# Altium PCB etapa_1.PcbDoc (part 2 of 2)
Units mil, origin at the board's own origin, x right, y up, seen from the top; angles counter-clockwise.
Board outline 2040 x 2040 mil, 4 copper layers (Top Layer, Conexiones, Tierra, Bottom Layer); 184 components, 104 nets, 594 pads, 243 vias.
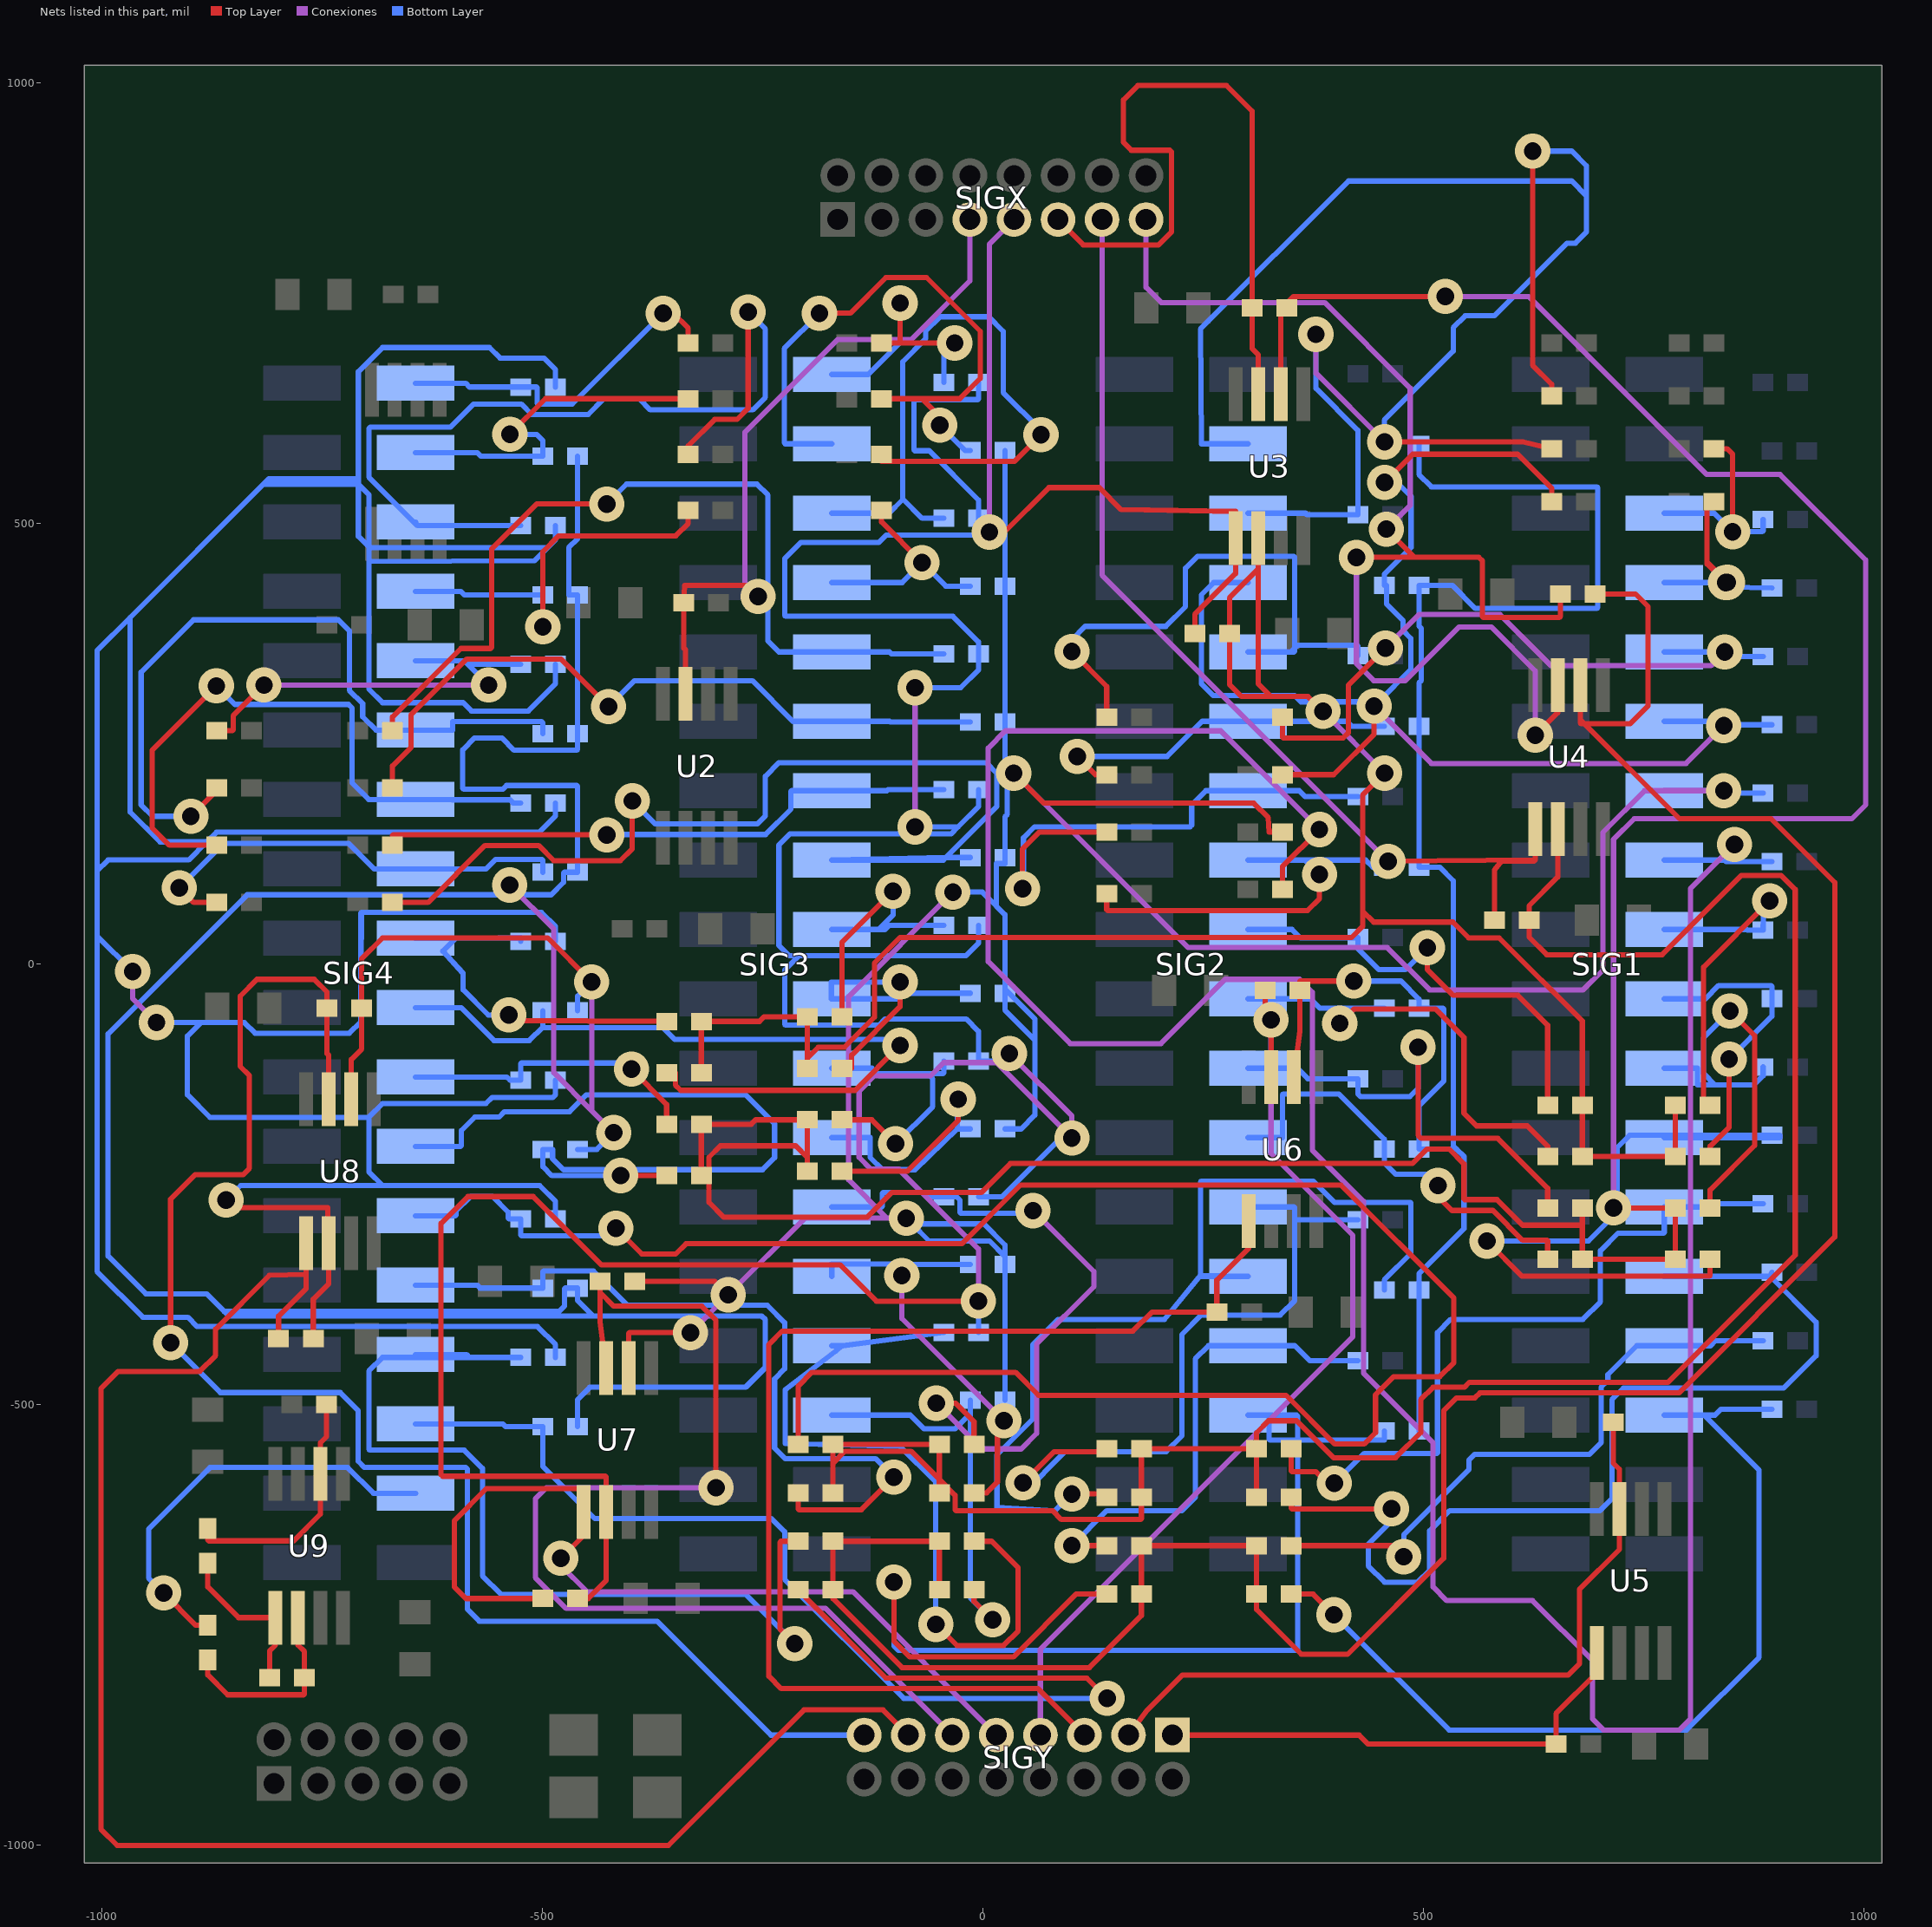
[diagram p4: the nets of this part, all layers, seen from the top]

## Via types
v1: diameter 40, hole 20, Top Layer to Bottom Layer, 192 vias
v2: diameter 40, hole 20, Top Layer to Conexiones, 51 vias

## Nets (pads, with @x,y where several pads share a name; then routed paths per layer and width w, separated by ;. In a path a pad name is that pad's centre, name@x,y a point inside that pad or via, vN(x,y) a via of type N, cw(c..) or ccw(c..) an arc to the next point about the centre after c; other vN are vias at no path point) (continued)
NetR4_2: R4.2 SIGX.7 U2.7 | length 801.1
  Top Layer w6: U2.7@-337.8,306.69 -337.8,356.75 -339.69,358.64 R4.2@-339.69,410 -338.69,429.75 -267.75,429.75 v2(-255.25,417.25)
  Conexiones w6: v2(-255.25,417.25) -270.25,432.25 -270.25,603.75 -165.25,708.75 -81.75,708.75 -15,775.5 SIGX.7@-15,845
NetR4x_2: R4x.2 R4y.2 SIG2.3 | length 1488.3
  Top Layer w6: v1(623.75,922.75) 623.75,679.75 645.31,658.18 R4x.2@645.31,645
  Bottom Layer w6: SIG2.3@300.72,590.55 247.75,590.55 246.75,720.75 414.75,888.75 668.25,888.75 684.75,872.25 ; R4y.2@455.31,590 455.31,617.54 533.66,695.89 533.66,722.21 547.25,735.79 580.36,735.79 662.81,818.25 672.25,818.25 684.75,830.75 684.75,872.25 ; v1(623.75,922.75) 668.25,922.75 684.75,906.25 684.75,872.25
NetR4y_1: R4y.1 R12.1 R12y.1 R20y.1 R28y.1 R36y.1 R44y.1 R52y.1 R60y.1 U6.6 | length 2117.2
  Top Layer w6: U6.6@352.8,-128.31 359.69,-76.36 R12.1@359.69,-30 359.69,-19.75 360.19,-19.25 v1(420.75,-19.25)
  Bottom Layer w6: v1(420.75,-19.25) 474.25,-19.25 494.69,-39.69 R36y.1@494.69,-50 521.75,-50 522.75,-51 522.75,-132.78 494.69,-160.84 R44y.1@494.69,-210 537.5,-210 ; R60y.1@494.69,-530 R52y.1@494.69,-370 494.69,-351.25 545.75,-300.19 545.75,-218.25 537.5,-210 ; R4y.1@494.69,590 494.69,555.75 508.69,541.75 696.75,541.75 697.75,540.75 697.75,404.75 696.75,403.75 558.75,403.75 532.5,430 R12y.1@494.69,430 494.69,383.66 497.5,380.84 497.5,321.97 494.69,319.16 R20y.1@494.69,270 R28y.1@494.69,110 518.25,110 533.75,94.5 533.75,-206.25 537.5,-210
NetR5_1: R5.1 R33x.1 R34x.1 R35x.1 R36x.1 R37x.1 R38x.1 R39x.1 R40x.1 U3.2 | length 2318.2
  Top Layer w6: R40x.1@-319.84,-123.33 R39x.1@-319.84,-65 -253.8,-65 -248.8,-60 R37x.1@-199.68,-60 -199.68,-106.75 ; R38x.1@-199.68,-118.33 -199.68,-106.75 ; U3.2@312.2,483.31 312.2,448.27 ; v2(385.75,286.75) 368.75,303.75 326.7,303.75 ; v2(455.75,216.75) 430.75,191.75 430.75,60.25 ; R33x.1@785.79,-160 R34x.1@785.79,-218.33 R36x.1@680.16,-218.33 R35x.1@680.16,-160 680.16,-64.53 585.87,29.75 551.25,29.75 533.25,47.75 443.25,47.75 430.75,60.25 ; -199.68,-106.75 -187.18,-94.25 -157.25,-94.25 -123.25,-60.25 -123.25,1.25 -94.25,30.25 418.25,30.25 430.75,42.75 430.75,60.25 ; 312.2,448.27 279.69,415.75 R5.1@279.69,375 279.69,317.31 293.25,303.75 326.7,303.75 ; 312.2,448.27 312.2,318.25 326.7,303.75
  Conexiones w6: v2(385.75,286.75) v2(455.75,216.75)
NetR5_2: R5.2 SIGX.9 U3.1 | length 834.9
  Top Layer w6: v2(7.12,490.37) 24.31,490.37 74.75,540.81 131.72,540.81 156.72,515.81 286.61,513.75 U3.1@286.61,483.31 286.61,443.25 240.31,396.95 R5.2@240.31,375
  Conexiones w6: v2(7.12,490.37) 7.12,817.12 SIGX.9@35,845
NetR5x_2: R5x.2 R5y.2 SIG3.1 | length 316.3
  Top Layer w6: R5x.2@-115.31,705 -95.25,705 ; v1(-94.25,750.25) -94.25,706 -95.25,705 ; v1(-32.19,705) -95.25,705
  Bottom Layer w6: SIG3.1@-171.72,669.29 -130.25,669.29 -94.25,705.29 v1(-94.25,750.25) ; R5y.2@-44.69,660 -44.69,692.5 v1(-32.19,705)
NetR5y_1: R5y.1 R13.1 R13y.1 R21y.1 R29y.1 R37y.1 R45y.1 R53y.1 R61y.1 U7.2 | length 4353.8
  Top Layer w6: R13.1@-460.31,-720 -448.25,-720 -427.8,-699.54 U7.2@-427.8,-621.69 -427.8,-582.25 -428.8,-581.25 -613.25,-581.25 -615.25,-579.25 -615.25,-294.25 -584.78,-263.78 -510.72,-263.78 -433.35,-341.16 -162.6,-341.16 -121.25,-382.5 v1(-5.31,-382.5)
  Conexiones w6: v1(-77.25,155.75) v1(-77.25,313.75) ; v1(-5.31,-382.5) -5.31,-323.19 -95.75,-232.75 -127.25,-232.75 -140.75,-219.25 -140.75,-144.25 -123.25,-126.75 -59.75,-126.75 -44.75,-111.75 15.25,-111.75 v1(100.75,-197.25) 100.75,-172.25 v1(29.75,-101.25)
  Bottom Layer w6: v1(-77.25,155.75) -28.31,155.75 ; v1(-77.25,313.75) -25.31,313.75 -5.31,333.75 R21y.1@-5.31,352 -5.31,365.81 -34.25,394.75 -224.25,394.75 -225.25,395.75 -225.25,460.25 -206.75,478.75 -118.25,478.75 -109.93,487.07 -6.93,487.07 -5.31,488.69 R13y.1@-5.31,506 -5.31,526.81 -61.16,582.66 -77.41,582.66 -78.5,583.75 -78.5,639.75 -77.5,640.75 -6.31,640.75 -5.31,641.75 R5y.1@-5.31,660 ; R61y.1@-5.31,-418 v1(-5.31,-382.5) ; R53y.1@-5.31,-264 21.5,-264 88.25,-197.25 v1(100.75,-197.25) ; R37y.1@-5.31,44 -5.31,23.75 -19.31,9.75 -208.75,9.75 ; R29y.1@-5.31,198 -5.31,178.75 -28.31,155.75 ; v1(29.75,-101.25) 21,-110 R45y.1@-5.31,-110 -5.31,-76.19 -19.25,-62.25 -111.25,-62.25 -118.25,-69.25 -224.25,-69.25 -225.25,-68.25 -225.25,-6.75 -208.75,9.75 ; -208.75,9.75 -220.25,9.75 -231.75,21.25 -231.75,135.25 -219.25,147.75 -36.31,147.75 -28.31,155.75
NetR6_1: R6.1 R41x.1 R42x.1 R43x.1 R44x.1 R45x.1 R46x.1 R47x.1 R48x.1 U3.6 | length 3687.4
  Top Layer w6: R48x.1@-319.84,-240 R47x.1@-319.84,-181.67 -263.25,-181.67 -258.25,-176.67 R45x.1@-199.68,-176.67 -199.68,-219.25 ; R46x.1@-199.68,-235 -199.68,-219.25 ; U3.6@337.8,646.69 337.8,743.25 R6.1@342.12,747.57 ; R6.1@344.69,745 R6.1@342.12,747.57 ; v2(524.75,757.75) 352.3,757.75 R6.1@342.12,747.57 ; R43x.1@680.16,-276.67 680.16,-295.25 ; v2(715.53,-276.67) R41x.1@785.79,-276.67 R42x.1@785.79,-335 R44x.1@680.16,-335 680.16,-295.25 ; -199.68,-219.25 -212.68,-206.25 -298.25,-206.25 -311.25,-219.25 -311.25,-270.25 -294.25,-287.25 -131.75,-287.25 -103.75,-259.25 -2.04,-259.25 30.96,-226.25 487.25,-226.25 503.75,-209.75 528.83,-209.75 545.75,-226.67 545.75,-266.25 546.75,-267.25 583.32,-267.25 612.32,-296.25 679.16,-296.25 680.16,-295.25
  Conexiones w6: v2(524.75,757.75) 619.25,757.75 821.25,555.75 904.75,555.75 1001.75,458.75 1001.75,180.75 986.09,165.09 739.09,165.09 715.53,141.53 v2(715.53,-276.67)
NetR6_2: R6.2 SIGX.11 U3.7 | length 833.9
  Top Layer w6: SIGX.11@85,845 113.69,816.31 199.25,816.31 213.69,830.75 213.69,921.75 211.75,923.69 168.25,923.69 159.25,932.69 159.25,980.75 175.72,997.22 276.35,997.22 305.31,968.25 R6.2@305.31,745 305.31,698.64 312.2,691.75 U3.7@312.2,646.69
NetR6x_2: R6x.2 R6y.2 SIG3.3 | length 702.5
  Top Layer w6: v1(-185.72,738.75) -150.67,738.75 -110.17,779.25 -64.19,779.25 -3.19,718.25 -3.19,664.81 -26.33,641.67 -69.25,641.67 ; R6x.2@-115.31,641.67 -69.25,641.67 ; v1(-49.25,611.75) -49.25,621.67 -69.25,641.67
  Bottom Layer w6: v1(-185.72,738.75) -225.72,698.75 -225.72,591.75 -224.52,590.55 SIG3.3@-171.72,590.55 ; v1(-49.25,611.75) -20.5,583 R6y.2@-14.69,583
NetR6y_1: R6y.1 R14.1 R14y.1 R22y.1 R30y.1 R38y.1 R46y.1 R54y.1 R62y.1 U7.6 | length 2430.1
  Top Layer w6: U7.6@-402.2,-458.31 -402.2,-419.25 -401.2,-418.25 v2(-332.25,-418.25) ; R14.1@-395.31,-360 -304.5,-360 v2(-289.25,-375.25)
  Conexiones w6: v2(-332.25,-418.25) v2(-289.25,-375.25) -202.25,-288.25 -109.25,-288.25 ; v1(-87.25,-288.25) -109.25,-288.25 ; v1(-34.25,81.75) -152.75,-36.75 -152.75,-244.75 -109.25,-288.25
  Bottom Layer w6: v1(-87.25,-288.25) v1@-80.66,-294.84 ; v1(-34.25,81.75) -0.84,81.75 15.22,65.68 ; R62y.1@24.69,-495 R54y.1@24.69,-341 R54y.1@24.69,-331.75 ; R46y.1@24.69,-187 43.25,-187 58.75,-171.5 58.75,-86.19 ; R6y.1@24.69,583 R14y.1@24.69,429 R22y.1@24.69,275 24.69,231.66 27.5,228.84 27.5,169.97 24.69,167.16 R30y.1@24.69,121 24.69,114.16 15.22,114.16 15.22,65.68 ; v1@-80.66,-294.84 -61.25,-314.25 7.19,-314.25 R54y.1@24.69,-331.75 ; v1@-80.66,-294.84 0.84,-294.84 24.69,-318.69 R54y.1@24.69,-331.75 ; 15.22,65.68 24.75,56.16 24.75,-28.25 58.75,-62.25 58.75,-86.19 ; 15.22,65.68 15.22,65.62 24.69,56.16 R38y.1@24.69,-33 24.69,-52.13 58.75,-86.19
NetR7_1: R7.1 R49x.1 R50x.1 R51x.1 R52x.1 R53x.1 R54x.1 R55x.1 R56x.1 U4.2 | length 2568.5
  Top Layer w6: R56x.1@-170.32,-600 -170.32,-566.32 ; R54x.1@-49.68,-600 -49.68,-584.82 ; R50x.1@310.32,-605 R49x.1@310.32,-550 ; U4.2@652.2,153.31 652.2,98.69 619.69,66.17 R7.1@619.69,50 619.69,30.75 639.69,10.75 770.75,10.75 860.75,100.75 905.75,100.75 921.75,84.75 921.75,-330.25 777.43,-474.57 551.93,-474.57 546.25,-480.25 510.75,-480.25 496.75,-494.25 496.75,-531.75 468.25,-560.25 397.8,-560.25 355.8,-518.25 323.82,-518.25 310.32,-531.75 R49x.1@310.32,-550 ; -170.32,-566.32 -156.75,-552.75 -81.75,-552.75 -49.68,-584.82 ; -170.32,-566.32 R55x.1@-170.32,-545 R53x.1@-49.68,-545 -49.68,-584.82 ; -49.68,-584.82 -31.75,-602.75 -31.75,-619.25 -30.75,-620.25 78.72,-620.25 88.72,-630.25 178.69,-630.25 179.69,-629.25 R52x.1@179.69,-605 R51x.1@179.69,-550 R49x.1@310.32,-550
NetR7_2: R7.2 SIGX.13 U4.1 | length 1173.2
  Top Layer w6: v2(459.75,116.75) 626.61,118.25 ; R7.2@580.31,50 580.31,106.9 588.26,116.75 625.11,116.75 626.61,118.25 ; U4.1@626.61,153.31 626.61,118.25
  Conexiones w6: SIGX.13@135,845 135,441.5 v2(459.75,116.75)
NetR7x_2: R7x.2 R7y.2 SIG4.1 | length 395.8
  Top Layer w6: v1(-363.25,738.75) -351.68,738.75 -334.69,721.75 R7x.2@-334.69,705
  Bottom Layer w6: SIG4.1@-644.16,659.29 -587.25,659.29 -582.96,655 R7y.2@-524.69,655 -507.25,655 -506.25,654 -506.25,636.75 -505.25,635.75 -466.25,635.75 v1(-363.25,738.75)
NetR7y_1: R7y.1 R15.1 R15y.1 R23y.1 R31y.1 R39y.1 R47y.1 R55y.1 R63y.1 U8.2 | length 6218.5
  Top Layer w6: v1(-859.25,-267.75) -850.75,-276.25 -743.8,-276.25 U8.2@-742.8,-316.69 -742.8,-362.73 -760.31,-380.25 R15.1@-760.31,-425
  Conexiones w6: v1(-965.25,-8.25) -965.25,-39.25 v1(-938.25,-66.25)
  Bottom Layer w6: v1(-965.25,-8.25) -1005.66,32.16 ; v1(-938.25,-66.25) -887.75,-66.25 ; v1(-859.25,-267.75) -842.75,-251.25 -681.75,-251.25 ; R63y.1@-485.31,-446.33 -485.31,-431.69 -505.75,-411.25 -892.25,-411.25 -902.75,-400.75 -953.75,-400.75 -1005.66,-348.84 -1005.66,32.16 ; R55y.1@-485.31,-289 -485.31,-269.25 -503.31,-251.25 -681.75,-251.25 ; R47y.1@-485.31,-131.67 -485.31,-148.31 -488.25,-151.25 -557.25,-151.25 -564.25,-158.25 -681.75,-158.25 -697.25,-173.75 -697.25,-174 ; R39y.1@-485.31,25.67 -485.31,42.81 -501.25,58.75 -705.25,58.75 ; R31y.1@-485.31,183 -485.31,168.25 -503.81,149.75 -870.25,149.75 -881.25,138.75 ; R23y.1@-485.31,340.33 -485.31,318.19 -516.25,287.25 -580.75,287.25 -590.25,296.75 -681.75,296.75 -697.25,312.25 -697.25,456.75 ; R15y.1@-485.31,497.66 -485.31,481.69 -494.25,472.75 ; R7y.1@-485.31,655 -485.31,674.75 -498.31,687.75 -548.25,687.75 -560.25,699.75 -681.75,699.75 -709.16,672.34 -709.16,550.75 ; -1005.66,32.16 -1005.66,105.75 ; -1005.66,105.75 -1005.66,355.94 -968.25,393.35 ; -1005.66,105.75 -993.16,118.25 -901.75,118.25 -881.25,138.75 ; -968.25,393.35 -816.85,544.75 ; -968.25,393.35 -968.25,172.75 -934.25,138.75 -881.25,138.75 ; -887.75,-66.25 -838.37,-66.25 -826.25,-78.37 -719.25,-78.37 -706.25,-65.37 ; -887.75,-66.25 -903.25,-81.75 -903.25,-148.25 -877.5,-174 -697.25,-174 ; -816.85,544.75 -810.85,550.75 -709.16,550.75 ; -816.85,544.75 -709.25,544.75 -709.16,544.66 ; -709.16,544.66 -697.25,532.75 -697.25,473.75 ; -709.16,544.66 -709.16,485.66 -697.25,473.75 ; -709.16,544.66 -709.16,550.75 ; -706.25,-65.37 -706.25,57.75 -705.25,58.75 ; -706.25,-65.37 -705.25,58.75 ; -697.25,-174 -697.25,-235.75 -681.75,-251.25 ; -697.25,456.75 -697.25,473.75 ; -697.25,456.75 -509.25,457.75 -494.25,472.75 ; -697.25,473.75 -696.25,472.75 -494.25,472.75
NetR8_1: R8.1 R57x.1 R58x.1 R59x.1 R60x.1 R61x.1 R62x.1 R63x.1 R64x.1 U4.6 | length 2977
  Top Layer w6: R62x.1@-49.68,-710 R61x.1@-49.68,-655 R63x.1@-170.32,-655 R64x.1@-170.32,-710 -170.32,-720.19 -92.19,-798.31 120.62,-798.31 179.69,-739.25 R60x.1@179.69,-715 R59x.1@179.69,-660 R57x.1@310.32,-660 R58x.1@310.32,-715 310.32,-732.32 361.25,-783.25 413.75,-783.25 522.75,-674.25 522.75,-506.75 537.25,-492.25 558.25,-492.25 563.93,-486.57 789.93,-486.57 966.75,-309.75 966.75,92.75 894.4,165.09 790.45,165.09 682.8,272.75 ; U4.6@677.8,316.69 677.8,277.75 ; R8.1@694.69,420 740.5,420 754.75,405.75 754.75,293.25 734.25,272.75 682.8,272.75 ; 677.8,277.75 677.8,273.75 678.8,272.75 682.8,272.75 ; 677.8,277.75 682.8,272.75
NetR8_2: R8.2 SIGX.15 U4.7 | length 1481.5
  Top Layer w6: v2(423.75,461.75) 489.75,461.75 ; v2(457.75,493.75) 489.75,461.75 ; v2(626.75,259.75) 652.2,285.2 U4.7@652.2,316.69 ; R8.2@655.31,420 655.31,394.75 653.85,393.28 567.75,393.28 566.75,394.28 566.75,457.75 562.75,461.75 489.75,461.75
  Conexiones w6: SIGX.15@185,845 185,768 202.25,750.75 387.75,750.75 484.75,653.75 484.75,520.75 v2(457.75,493.75) ; v2(423.75,461.75) 423.75,341.25 443.25,321.75 479.25,321.75 540.25,382.75 576.75,382.75 626.75,332.75 v2(626.75,259.75)
NetR8x_2: R8x.2 R8y.2 SIG4.3 | length 423.7
  Top Layer w6: v1(-537.19,601.25) -496.77,641.67 R8x.2@-334.69,641.67
  Bottom Layer w6: SIG4.3@-644.16,580.55 -574.25,580.55 -570.03,576.33 R8y.2@-499.69,576.33 -499.69,594.18 -506.75,601.25 v1(-537.19,601.25)
NetR8y_1: R8y.1 R16.1 R16y.1 R24y.1 R32y.1 R40y.1 R48y.1 R56y.1 R64y.1 U8.6 | length 4256.5
  Top Layer w6: U8.6@-717.2,-153.31 -717.2,-108.25 -705.31,-96.36 R16.1@-705.31,-50 -705.31,6.19 -681.75,29.75 -494.25,29.75 v1(-444.25,-20.25)
  Conexiones w6: v1(-537.25,89.75) -487.25,39.75 -487.25,-123.25 -444.25,-166.25 ; v1(-444.25,-20.25) -444.25,-166.25 ; v1(-419.25,-191.25) -444.25,-166.25
  Bottom Layer w6: v1(-537.25,89.75) v1@-548.25,78.75 ; R64y.1@-460.31,-525 -460.31,-494.25 -446.31,-480.25 -270.25,-480.25 ; R48y.1@-460.31,-210.33 -438.33,-210.33 v1(-419.25,-191.25) ; R40y.1@-460.31,-53 -460.31,-36.31 v1(-444.25,-20.25) ; R8y.1@-460.31,576.33 -460.31,482.69 -470.25,472.75 -470.25,419 R16y.1@-460.31,419 R24y.1@-460.31,261.67 -460.31,243.75 -461.31,242.75 -532.25,242.75 -546.25,256.75 -577.22,256.75 -590.72,243.25 -590.72,199.75 -589.47,198.5 -545.25,198.5 -541,202.75 -461.31,202.75 -460.31,201.75 R32y.1@-460.31,104.33 -475.25,104.33 -476.25,103.33 -476.25,92.75 -490.25,78.75 v1@-548.25,78.75 ; -861.25,-394.25 -856.25,-399.25 -442.81,-399.25 ; -861.25,-394.25 -881.25,-374.25 -950.25,-374.25 -993.25,-331.25 -993.25,-79.25 -835.25,78.75 v1@-548.25,78.75 ; -861.25,-394.25 -481.25,-394.25 -475.25,-388.25 -475.25,-368.67 -474.25,-367.67 R56y.1@-460.31,-367.67 -460.31,-381.75 -442.81,-399.25 ; -442.81,-399.25 -251.75,-399.25 ; -270.25,-480.25 -247.25,-457.25 ; -270.25,-480.25 -269.25,-480.25 -247.25,-458.25 -247.25,-457.25 ; -251.75,-399.25 -251.25,-399.25 -247.25,-403.25 -247.25,-403.75 ; -251.75,-399.25 -247.25,-403.75 ; -247.25,-457.25 -247.25,-403.75
NetR9_2: R9.2 SIGY.1 U5.1 | length 561.9
  Top Layer w6: SIGY.1@215,-875 426.75,-875 436.75,-885 R9.2@650.31,-885 650.31,-850.55 696.61,-804.25 U5.1@696.61,-781.69
NetR9x_2: R9x.2 R9y.2 SIG1.5 | length 245.8
  Top Layer w6: R9x.2@829.69,585 844.45,585 850.75,578.7 v1(850.75,490.75)
  Bottom Layer w6: SIG1.5@773.16,511.81 829.69,511.81 v1(850.75,490.75) 884.31,490.75 885.31,491.75 R9y.2@885.31,504.67
NetR10_2: R10.2 SIGY.3 U5.7 | length 843.5
  Top Layer w6: SIGY.3@165,-875 185.75,-847.31 226.31,-806.75 664.25,-806.75 676.75,-794.25 676.75,-709.71 722.2,-664.25 U5.7@722.2,-618.31 722.2,-573.25 715.31,-566.36 R10.2@715.31,-520
NetR10x_2: R10x.2 R10y.2 SIG1.7 | length 266.5
  Top Layer w6: R10x.2@829.69,525 821.75,525 821.75,456.25 ; v1(842.75,433.07) 821.75,454.07 821.75,456.25 ; v1(844.75,433.25) 821.75,456.25
  Bottom Layer w6: SIG1.7@773.16,433.07 v1(842.75,433.07) ; v1(844.75,433.25) 844.75,428 R10y.2@895.31,427
NetR11_2: R11.2 SIGY.5 U6.1 | length 1404.5
  Top Layer w6: SIGY.5@115,-875 62.31,-822.31 -229.19,-822.31 -243.25,-808.25 -243.25,-431.75 -228.07,-416.57 170,-416.57 191.58,-395 R11.2@265.31,-395 265.31,-358.69 301.61,-322.39 U6.1@301.61,-291.69
NetR11x_2: R11x.2 R11y.2 SIG2.5 | length 694.6
  Top Layer w6: v2(455.75,592.75) 612.75,592.75 R11x.2@645.31,585
  Conexiones w6: v1(377.75,714.75) 377.75,670.75 v2(455.75,592.75)
  Bottom Layer w6: SIG2.5@300.72,511.81 365.93,511.81 367.74,510 R11y.2@425.31,510 425.31,605.75 377.75,653.31 v1(377.75,714.75)
NetR12_2: R12.2 SIGY.7 U6.7 | length 1118.6
  Top Layer w6: R12.2@320.31,-30 320.31,-76.36 327.2,-83.25 ; v2(326.75,-63.25) 327.2,-63.71 327.2,-83.25 ; U6.7@327.2,-128.31 327.2,-83.25
  Conexiones w6: SIGY.7@65,-875 65,-777.57 419.75,-422.82 419.75,-307.85 326.75,-214.85 v2(326.75,-63.25)
NetR12x_2: R12x.2 R12y.2 SIG2.7 | length 914.5
  Top Layer w6: v1(455.75,546.75) 487.75,578.75 606.75,578.75 645.31,540.18 R12x.2@645.31,525
  Bottom Layer w6: SIG2.7@300.72,433.07 261.75,433.07 247.72,419.04 247.72,318.25 261.22,304.75 353.75,304.75 360.75,297.75 448.75,297.75 485.5,334.5 485.5,369.75 476.75,378.5 476.75,389.75 457.75,408.75 457.75,430 R12y.2@455.31,430 455.31,442.49 485.75,472.93 485.75,530.75 469.75,546.75 v1(455.75,546.75)
NetR13_2: R13.2 SIGY.9 U7.1 | length 1015
  Top Layer w6: R13.2@-499.69,-720 -587,-720 -600.25,-706.75 -600.25,-631.75 -563.75,-595.25 -453.39,-595.25 U7.1@-453.39,-621.69 -453.39,-648.39 v2(-479.25,-674.25)
  Conexiones w6: v2(-479.25,-674.25) -479.25,-682.55 -449.55,-712.25 -147.75,-712.25 SIGY.9@15,-875
NetR13x_2: R13x.2 R13y.2 SIG3.5 | length 782.3
  Top Layer w6: R13x.2@-115.31,578.33 -115.31,570.75 35.75,570.75 v1(65.75,600.75)
  Bottom Layer w6: SIG3.5@-171.72,511.81 -106.75,511.81 -91.25,527.31 -91.25,528 ; R13y.2@-44.69,506 -69.25,506 -91.25,528 ; v1(65.75,600.75) 65.75,605.75 22.75,648.75 22.75,718.25 6.25,734.75 -48.75,734.75 -65.25,718.25 -65.25,709.72 -91.25,683.72 -91.25,528
NetR14_2: R14.2 SIGY.11 U7.7 | length 1280.2
  Top Layer w6: R14.2@-434.69,-360 -434.69,-372.82 ; U7.7@-427.8,-458.31 -434.69,-406.36 -434.69,-372.82 ; v2(-303.25,-594.25) -303.25,-404.25 -319.25,-388.25 -419.25,-388.25 -434.69,-372.82
  Conexiones w6: v2(-303.25,-594.25) -495.75,-594.25 -508.25,-606.75 -508.25,-696.25 -473.25,-731.25 -178.75,-731.25 SIGY.11@-35,-875
NetR14x_2: R14x.2 R14y.2 SIG3.7 | length 255.8
  Top Layer w6: R14x.2@-115.31,515 -115.31,501.81 v1(-69.25,455.75)
  Bottom Layer w6: SIG3.7@-171.72,433.07 -91.93,433.07 v1(-69.25,455.75) -42.5,429 R14y.2@-14.69,429
NetR15_2: R15.2 SIGY.13 U8.1 | length 1924.5
  Top Layer w6: R15.2@-799.69,-425 -799.69,-399.55 -768.39,-368.25 -768.39,-352.25 ; U8.1@-768.39,-316.69 -768.39,-352.25 ; SIGY.13@-85,-875 -113.69,-846.31 -203.31,-846.31 -357.25,-1000.25 -982.75,-1000.25 -1001.25,-981.75 -1001.25,-481.75 -981.75,-462.25 -889.25,-462.25 -871.25,-444.25 -871.25,-414.25 -810.25,-353.25 -768.39,-352.25
NetR15x_2: R15x.2 R15y.2 SIG4.5 | length 1049.9
  Top Layer w6: R15x.2@-334.69,578.33 -334.69,588.31 -304.75,618.25 -279.25,618.25 -266.75,630.75 v1(-266.75,740.25)
  Bottom Layer w6: SIG4.5@-644.16,501.81 SIG4.5@-642.08,497.66 ; R15y.2@-524.69,497.66 SIG4.5@-642.08,497.66 ; v1(-266.75,740.25) -247.25,720.75 -247.25,643.25 -261.5,629 -377.72,629 -390.22,641.5 -430.47,641.5 -448.22,623.75 -512.25,623.75 -524.25,635.75 -578.25,635.75 -604.45,609.55 -695.36,609.55 -697.16,607.75 -697.16,552.75 SIG4.5@-642.08,497.66
NetR16_2: R16.2 SIGY.15 U8.7 | length 1800.2
  Top Layer w6: v1(-922.25,-429.75) -922.25,-266.75 -894.25,-238.75 -839.72,-238.75 -832.72,-231.75 -832.72,-126.53 -843.25,-116 -843.25,-36.25 -824.25,-17.25 -759.19,-17.25 -744.69,-31.75 R16.2@-744.69,-50 -744.69,-101.36 -742.8,-103.25 U8.7@-742.8,-153.31
  Bottom Layer w6: v1(-922.25,-429.75) -865.75,-486.25 -729.75,-486.25 -709.25,-506.75 -709.25,-564.25 -702.25,-571.25 -587.25,-571.25 -585.25,-573.25 -585.25,-732.25 -571.79,-745.72 -370,-745.72 -240.72,-875 SIGY.15@-135,-875
NetR16x_2: R16x.2 R16y.2 SIG4.7 | length 461
  Top Layer w6: v1(-499.69,382.75) -499.69,468.25 -481.93,486 -348.75,486 -334.69,500.07 R16x.2@-334.69,515
  Bottom Layer w6: SIG4.7@-644.16,423.07 -592.82,423.07 -588.75,419 R16y.2@-499.69,419 v1(-499.69,382.75)
NetR17_1: R17.1 R18.1 U9.2 | length 226.1
  Top Layer w6: R17.1@-880,-789.68 -880,-806.75 -857.5,-829.25 -771.31,-829.25 -770.31,-828.25 R18.1@-770.31,-810 -770.31,-780.25 -777.8,-772.77 U9.2@-777.8,-741.69
NetR17_2: R17.2 SIG4.33 | length 489.3
  Top Layer w6: v1(-930.25,-713.75) -893.69,-750.31 R17.2@-880,-750.31
  Bottom Layer w6: v1(-930.25,-713.75) -947.25,-696.75 -947.25,-641.09 -877.41,-571.25 -721.25,-571.25 -691.95,-600.55 SIG4.33@-644.16,-600.55
NetR17x_2: R17x.2 R17y.2 SIG1.9 | length 775.1
  Top Layer w6: R17x.2@339.69,280 339.69,257.75 340.69,256.75 408.75,256.75 414.75,262.75 414.75,316.75 v2(456.75,358.75)
  Conexiones w6: v2(456.75,358.75) 494.75,396.75 586.75,396.75 644.75,338.75 826.17,338.75 v1(841.75,354.33)
  Bottom Layer w6: SIG1.9@773.16,354.33 v1@825.75,354.33 ; v1(841.75,354.33) v1@825.75,354.33 ; R17y.2@885.31,349.33 830.75,349.33 v1@825.75,354.33
NetR18_2: R18.2 R19.1 U9.1 | length 189.1
  Top Layer w6: R19.1@-880,-679.68 -880,-706.75 -845.06,-741.69 U9.1@-803.39,-741.69 -803.39,-772.95 -809.69,-779.25 R18.2@-809.69,-810
NetR18x_2: R18x.2 R18y.2 SIG1.11 | length 729.9
  Top Layer w6: R18x.2@339.69,215 397.89,215 443.75,260.86 v2(443.75,292.75)
  Conexiones w6: v2(443.75,292.75) 508.75,227.75 797.75,227.75 v1(840.75,270.75)
  Bottom Layer w6: SIG1.11@773.16,275.59 v1@831.75,275.59 ; v1(840.75,270.75) v1@831.75,275.59 ; R18y.2@895.31,271.67 840.75,271.67 v1@831.75,275.59
NetR19_2: R19.2 R20.1 U9.6 | length 280.9
  Top Layer w6: R19.2@-880,-640.31 -880,-653.25 -878.7,-654.55 -782.55,-654.55 -752.2,-624.2 U9.6@-752.2,-578.31 -752.2,-543.25 -745.31,-536.36 R20.1@-745.31,-500
NetR19x_2: R19x.2 R19y.2 SIG2.9 | length 672.9
  Top Layer w6: v1(100.75,354.75) 140.31,315.18 R19x.2@140.31,280
  Bottom Layer w6: v1(100.75,354.75) 100.75,368.25 115.83,383.33 207.33,383.33 229.75,405.75 229.75,449.25 243.25,462.75 352.75,462.75 353.75,461.75 353.75,358.83 ; SIG2.9@300.72,354.33 349.25,354.33 ; R19y.2@425.31,350 425.31,360.75 424.28,361.78 356.7,361.78 353.75,358.83 ; 349.25,354.33 353.75,358.83 ; 349.25,354.33 352.75,354.33 353.75,355.33 353.75,358.83
NetR20x_2: R20x.2 R20y.2 SIG2.11 | length 409.5
  Top Layer w6: v1(106.75,235.75) 127.5,215 R20x.2@140.31,215
  Bottom Layer w6: v1(106.75,235.75) 208.91,235.75 248.75,275.59 SIG2.11@300.72,275.59 412.75,275.59 418.34,270 R20y.2@455.31,270
NetR21x_2: R21x.2 R21y.2 SIG3.9 | length 992.8
  Top Layer w6: R21x.2@-670.31,265 -670.31,280.71 -592.75,358.28 -559.16,358.28 -557.69,359.75 -557.69,471.31 -506.75,522.25 v1(-427.25,522.25)
  Bottom Layer w6: v1(-427.25,522.25) -404.75,544.75 -256.75,544.75 -244.25,532.25 -244.25,366.83 -231.75,354.33 SIG3.9@-171.72,354.33 -106.25,354.33 -103.92,352 R21y.2@-44.69,352
NetR22x_2: R22x.2 R22y.2 SIG3.11 | length 806.5
  Top Layer w6: R22x.2@-670.31,200 -670.31,224.94 -649.5,245.75 -649.5,282.78 -586,346.28 -479.29,346.28 v1(-425.25,292.25)
  Bottom Layer w6: v1(-425.25,292.25) -395.75,321.75 -262.01,321.75 -215.85,275.59 SIG3.11@-171.72,275.59 -106.25,275.59 -105.66,275 R22y.2@-14.69,275
NetR23x_2: R23x.2 R23y.2 SIG4.9 | length 499.2
  Top Layer w6: R23x.2@-869.69,265 -852.25,265 -851.25,266 -851.25,281.75 v2(-816.25,316.75)
  Conexiones w6: v2(-816.25,316.75) v1(-561.25,316.75)
  Bottom Layer w6: SIG4.9@-644.16,344.33 -588.83,344.33 ; v1(-561.25,316.75) -588.83,344.33 ; R23y.2@-524.69,340.33 -583.26,340.33 -587.25,344.33 -588.83,344.33
NetR24x_2: R24x.2 R24y.2 SIG4.11 | length 861.5
  Top Layer w6: v1(-899.25,167.75) -872.25,194.75 -872.25,200 R24x.2@-869.69,200
  Bottom Layer w6: v1(-899.25,167.75) -942.66,167.75 -955.66,180.75 -955.66,331.34 -896.25,390.75 -731.75,390.75 -719.25,378.25 -719.25,310.72 -704.25,295.72 -704.25,280.75 -689.09,265.59 SIG4.11@-644.16,265.59 -602.25,265.59 -602.25,275.25 -501.19,275.25 -499.69,273.75 R24y.2@-499.69,261.67
NetR25x_2: R25x.2 R25y.2 SIG1.13 | length 1560.6
  Top Layer w6: v2(34.75,216.75) 68.75,182.75 307.25,182.75 323.75,166.25 324.75,150 R25x.2@339.69,150
  Conexiones w6: v2(34.75,216.75) 232.75,18.75 458.75,18.75 506.75,-29.25 681.03,-29.25 703.53,-6.75 703.53,149.53 750.85,196.85 v1(840.75,196.85)
  Bottom Layer w6: SIG1.13@773.16,196.85 v1@827.75,196.85 ; v1(840.75,196.85) v1@827.75,196.85 ; R25y.2@885.31,194 830.6,194 v1@827.75,196.85
NetR26x_2: R26x.2 R26y.2 SIG1.15 | length 3497.1
  Top Layer w6: R26x.2@339.69,85 339.69,110.69 v2(381.75,152.75)
  Conexiones w6: v2(381.75,152.75) 269.75,264.75 25.25,264.75 5.75,245.25 5.75,2.75 98.75,-90.25 201.75,-90.25 274.75,-17.25 359.25,-17.25 373.75,-31.75 373.75,-211.25 431.75,-269.25 431.75,-464.25 510.75,-543.25 510.75,-706.75 526.25,-722.25 623.75,-722.25 691.75,-790.25 691.75,-856.75 704.25,-869.25 790.25,-869.25 802.75,-856.75 802.75,85.75 v1(852.75,135.75)
  Bottom Layer w6: SIG1.15@773.16,118.11 835.11,118.11 ; v1(852.75,135.75) 835.11,118.11 ; R26y.2@895.31,116.33 843.3,116.33 841.53,118.11 835.11,118.11
NetR27x_2: R27x.2 R27y.2 SIG2.13 | length 624.5
  Top Layer w6: v1(44.75,85.75) 44.75,130.75 64,150 R27x.2@140.31,150
  Bottom Layer w6: v1(44.75,85.75) 45.75,86.75 45.75,143.25 58.35,155.85 234.82,155.85 236.72,157.75 236.72,180.75 252.82,196.85 SIG2.13@300.72,196.85 358.75,196.85 365.6,190 R27y.2@425.31,190
NetR28x_2: R28x.2 R28y.2 SIG2.15 | length 474.3
  Top Layer w6: R28x.2@140.31,80 140.31,61.75 141.31,60.75 368.25,60.75 381.75,74.25 v1(381.75,101.75)
  Bottom Layer w6: SIG2.15@300.72,118.11 365.39,118.11 ; v1(381.75,101.75) 365.39,118.11 ; R28y.2@455.31,110 442.25,110 434.14,118.11 365.39,118.11
NetR29x_2: R29x.2 R29y.2 SIG3.13 | length 669.8
  Top Layer w6: R29x.2@-670.31,135 -670.31,145.75 -669.31,146.75 v1(-427.25,146.75)
  Bottom Layer w6: v1(-427.25,146.75) -426.89,147.11 -246.89,147.11 -218.25,175.75 -218.25,195.85 -217.25,196.85 SIG3.13@-171.72,196.85 -109.25,196.85 -108.1,198 R29y.2@-44.69,198
NetR30x_2: R30x.2 R30y.2 SIG3.15 | length 1258.3
  Top Layer w6: R30x.2@-670.31,70 -630,70 -565.25,134.75 -504.59,134.75 -487.18,117.33 -411.67,117.33 -398.25,130.75 v1(-398.25,185.25)
  Bottom Layer w6: v1(-398.25,185.25) -372.11,159.11 -256.39,159.11 -247.25,168.25 -247.25,213.25 -231.75,228.75 3.5,228.75 15.5,216.75 15.5,178.75 -42.25,121 ; R30y.2@-14.69,121 -42.25,121 ; -42.25,121 SIG3.15@-171.72,118.11 -45.14,118.11 -42.25,121
NetR31x_2: R31x.2 R31y.2 SIG4.13 | length 723.5
  Top Layer w6: v1(-870.25,315.75) -943.25,242.75 -943.25,154.75 -923.5,135 R31x.2@-869.69,135
  Bottom Layer w6: v1(-870.25,315.75) -849.25,294.75 -720.25,294.75 -716.25,290.75 -716.25,205.75 -697.35,186.85 SIG4.13@-644.16,186.85 -602.72,186.85 -602.72,186.5 -537,186.5 -533.5,183 R31y.2@-524.69,183
NetR32x_2: R32x.2 R32y.2 SIG4.15 | length 513.7
  Top Layer w6: v1(-912.5,86.5) -896.01,70 R32x.2@-869.69,70
  Bottom Layer w6: v1(-912.5,86.5) -861.89,137.11 -720.25,137.11 -691.25,108.11 SIG4.15@-644.16,108.11 -564.15,108.11 -553.52,118.75 -500.69,118.75 -499.69,117.75 R32y.2@-499.69,104.33
NetR33x_2: R33x.2 R33y.2 SIG1.17 | length 418.5
  Top Layer w6: R33x.2@825.16,-160 817.75,-160 817.75,-3.25 v1(892.75,71.75)
  Bottom Layer w6: SIG1.17@773.16,39.37 866.69,39.37 867.4,38.67 R33y.2@885.31,38.67 886.11,65.11 v1(892.75,71.75)
NetR34x_2: R34x.2 R34y.2 SIG1.19 | length 351
  Top Layer w6: R34x.2@825.16,-218.33 825.16,-206.75 846.75,-185.16 v1(846.75,-107.75)
  Bottom Layer w6: SIG1.19@773.16,-39.37 819.75,-39.37 834.88,-24.24 894.3,-24.24 895.31,-25.25 R34y.2@895.31,-39 895.31,-59.19 v1(846.75,-107.75)
NetR35x_2: R35x.2 R35y.2 SIG2.17 | length 518.3
  Top Layer w6: v1(504.25,18.75) 504.25,-6.25 533.37,-35.37 606.9,-35.37 640.79,-69.25 R35x.2@640.79,-160
  Bottom Layer w6: SIG2.17@300.72,39.37 350.52,39.37 359.89,30 R35y.2@425.31,30 425.31,17.75 449.31,-6.25 479.25,-6.25 v1(504.25,18.75)
NetR36x_2: R36x.2 R36y.2 SIG2.19 | length 552.6
  Top Layer w6: v1(404.75,-67.25) 420.92,-51.08 513.61,-51.08 545.75,-83.22 545.75,-169.25 560.09,-183.59 617.62,-183.59 640.79,-206.75 R36x.2@640.79,-218.33
  Bottom Layer w6: SIG2.19@300.72,-39.37 371.75,-39.37 382.38,-50 422,-50 ; v1(404.75,-67.25) 422,-50 ; R36y.2@455.31,-50 422,-50
NetR37x_2: R37x.2 R37y.2 SIG3.17 | length 345.9
  Top Layer w6: R37x.2@-160.31,-60 -160.31,24.69 v1(-102.25,82.75)
  Bottom Layer w6: SIG3.17@-171.72,39.37 -118.63,39.37 ; v1(-102.25,82.75) -102.25,55.75 -118.63,39.37 ; R37y.2@-44.69,44 -106.62,44 -111.25,39.37 -118.63,39.37
NetR38x_2: R38x.2 R38y.2 SIG3.19 | length 389.2
  Top Layer w6: R38x.2@-160.31,-118.33 -149.28,-118.33 -149.28,-103.25 -94.25,-48.22 v1(-94.25,-20.25)
  Bottom Layer w6: v1(-94.25,-20.25) -172.25,-20.25 -172.25,-39.37 SIG3.19@-171.72,-39.37 -97.25,-39.37 -90.88,-33 R38y.2@-14.69,-33
NetR39x_2: R39x.2 R39y.2 SIG4.17 | length 446.3
  Top Layer w6: v1(-538.25,-57.75) -538.25,-64 R39x.2@-359.21,-65
  Bottom Layer w6: SIG4.17@-644.16,29.37 -598.63,29.37 ; v1(-538.25,-57.75) -561.75,-57.75 -590.25,-29.25 -590.25,-10.25 -613.25,14.75 -598.63,29.37 ; R39y.2@-524.69,25.67 -524.69,29.75 -549.87,29.75 -598.63,29.37
NetR40x_2: R40x.2 R40y.2 SIG4.19 | length 901.3
  Top Layer w6: R40x.2@-359.21,-123.33 -349.25,-123.33 -349.25,-137.25 -343.25,-143.25 -145.25,-143.25 v1(-94.25,-92.25)
  Bottom Layer w6: SIG4.19@-644.16,-49.37 -592.47,-49.37 -555.09,-86.75 -515.19,-86.75 -499.69,-71.25 ; R40y.2@-499.69,-53 -499.69,-71.25 ; v1(-94.25,-92.25) -101.25,-85.25 -350.25,-85.25 -363.25,-72.25 -498.69,-72.25 -499.69,-71.25
NetR41x_2: R41x.2 R41y.2 SIG1.21 | length 503.5
  Top Layer w6: R41x.2@825.16,-276.67 825.16,-256.34 875.75,-205.75 875.75,-81.25 v1(847.75,-53.25)
  Bottom Layer w6: SIG1.21@773.16,-118.11 810.75,-118.11 810.75,-137.25 830.75,-137.25 ; v1(847.75,-53.25) 817.75,-83.25 817.75,-124.25 830.75,-137.25 ; R41y.2@885.31,-116.67 885.31,-126.69 874.75,-137.25 830.75,-137.25
NetR42x_2: R42x.2 R42y.2 SIG1.23 | length 847.2
  Top Layer w6: v1(571.75,-314.25) 611.75,-354.25 824.16,-354.25 825.16,-353.25 R42x.2@825.16,-335
  Bottom Layer w6: v1(571.75,-314.25) 687.19,-314.25 719.75,-281.69 719.75,-208.25 733.67,-194.33 R42y.2@895.31,-194.33 904.13,-194.33 904.13,-196.85 SIG1.23@773.16,-196.85
NetR43x_2: R43x.2 R43y.2 SIG2.21 | length 561.4
  Top Layer w6: v1(493.75,-94.25) 493.75,-194.25 497.25,-197.75 584.29,-197.75 640.79,-254.25 R43x.2@640.79,-276.67
  Bottom Layer w6: SIG2.21@300.72,-118.11 356.75,-118.11 368.64,-130 R43y.2@425.31,-130 425.31,-147.32 428.25,-150.25 484.5,-150.25 493.75,-141 v1(493.75,-94.25)
NetR44x_2: R44x.2 R44y.2 SIG2.23 | length 501.8
  Top Layer w6: v1(516.25,-251.25) 516.25,-263.75 532.09,-279.59 578.69,-279.59 612.42,-313.33 639.75,-313.33 640.79,-314.37 R44x.2@640.79,-335
  Bottom Layer w6: SIG2.23@300.72,-196.85 339.75,-196.85 339.75,-148.25 340.75,-147.25 403.75,-147.25 455.31,-198.82 R44y.2@455.31,-210 455.31,-225.38 468.25,-238.32 503.31,-238.32 v1(516.25,-251.25)
NetR45x_2: R45x.2 R45y.2 SIG3.21 | length 372
  Top Layer w6: R45x.2@-160.31,-176.67 -126.34,-176.67 v1(-99.25,-203.75)
  Bottom Layer w6: SIG3.21@-171.72,-118.11 -126.39,-118.11 -120.25,-124.25 ; v1(-99.25,-203.75) -57.25,-161.75 -57.25,-130.11 -60.61,-126.75 -117.75,-126.75 -120.25,-124.25 ; R45y.2@-44.69,-110 -44.69,-123.25 -45.69,-124.25 -120.25,-124.25
NetR46x_2: R46x.2 R46y.2 SIG3.23 | length 418.6
  Top Layer w6: R46x.2@-160.31,-235 -86,-235 -28.25,-177.25 v1(-28.25,-153.25)
  Bottom Layer w6: SIG3.23@-171.72,-196.85 -128.25,-196.85 -128.25,-219.25 -114.25,-233.25 -77.25,-233.25 -29.25,-187 ; v1(-28.25,-153.25) -29.25,-153.25 -29.25,-187 ; R46y.2@-14.69,-187 -29.25,-187
NetR47x_2: R47x.2 R47y.2 SIG4.21 | length 347.1
  Top Layer w6: v1(-399.21,-119.25) -359.21,-159.25 R47x.2@-359.21,-181.67
  Bottom Layer w6: SIG4.21@-644.16,-128.11 -540.64,-128.11 -537.08,-131.67 R47y.2@-524.69,-131.67 -524.69,-113.25 -523.69,-112.25 -406.21,-112.25 v1(-399.21,-119.25)
NetR48x_2: R48x.2 R48y.2 SIG4.23 | length 942.2
  Top Layer w6: v1(-411.5,-240) R48x.2@-359.21,-240
  Bottom Layer w6: SIG4.23@-644.16,-206.85 -593.25,-206.85 -592.25,-205.85 -592.25,-188.78 -576.97,-173.5 -549.26,-173.5 -543.25,-167.49 -469.49,-167.49 -450.25,-148.25 -269.75,-148.25 -236.72,-181.28 -236.72,-219.72 -250.25,-233.25 -476.25,-233.25 -488.66,-220.84 -488.66,-210.33 R48y.2@-499.69,-210.33 -499.69,-229.82 -489.5,-240 v1(-411.5,-240)
NetR49x_2: R49x.2 R49y.2 SIG1.25 | length 828.5
  Top Layer w6: R49x.2@349.69,-550 349.69,-575.25 350.69,-576.25 377.75,-576.25 390.75,-589.25 v1(398.75,-589.25)
  Bottom Layer w6: v1(398.75,-589.25) 432.75,-555.25 514.75,-555.25 515.75,-554.25 515.75,-418.25 530.75,-403.25 680.75,-403.25 700.75,-383.25 700.75,-325.25 720.75,-305.25 772.16,-305.25 773.16,-304.25 SIG1.25@773.16,-275.59 818.75,-275.59 822.34,-272 R49y.2@885.31,-272
NetR50x_2: R50x.2 R50y.2 SIG1.27 | length 1153.9
  Top Layer w6: R50x.2@349.69,-605 349.69,-617.25 350.69,-618.25 v1(463.75,-618.25)
  Bottom Layer w6: v1(463.75,-618.25) 463.75,-632 437.25,-658.5 437.25,-683 455.75,-701.5 493.25,-701.5 506.75,-688 506.75,-643.25 529.75,-620.25 700.25,-620.25 713.75,-606.75 713.75,-494.25 726.75,-481.25 908.67,-481.25 945.5,-444.43 945.5,-406.36 R50y.2@893.46,-354.33 ; SIG1.27@773.16,-354.33 R50y.2@893.46,-354.33 ; R50y.2@895.31,-349.67 R50y.2@893.46,-354.33
NetR51x_2: R51x.2 R51y.2 SIG2.25 | length 822.5
  Top Layer w6: v1(45.25,-588.75) 80.69,-553.31 131.72,-553.31 131.72,-550 R51x.2@140.31,-550
  Bottom Layer w6: v1(45.25,-588.75) 45.25,-601.25 93.19,-553.31 207.72,-553.31 225.64,-535.38 225.64,-420.36 247.75,-398.25 337.25,-398.25 353.75,-381.75 353.75,-290 ; SIG2.25@300.72,-275.59 352.75,-275.59 353.75,-276.59 353.75,-290 ; R51y.2@425.31,-290 353.75,-290
NetR52x_2: R52x.2 R52y.2 SIG2.27 | length 1138.6
  Top Layer w6: v1(100.75,-601.25) 140.31,-601.25 R52x.2@140.31,-605
  Bottom Layer w6: v1(100.75,-601.25) 81.75,-620.25 15.75,-616.25 15.75,-556.86 56.61,-515.99 56.61,-431.75 85.11,-403.25 205.75,-403.25 246.75,-353.33 ; R52y.2@455.31,-370 455.31,-358.44 485.5,-328.25 485.5,-271 484.75,-270.25 398.75,-270.25 374.75,-246.25 247.75,-246.25 246.75,-247.25 246.75,-353.33 ; 246.75,-353.33 247.75,-354.33 SIG2.27@300.72,-354.33 246.75,-353.33
NetR53x_2: R53x.2 R53y.2 SIG3.25 | length 791.5
  Top Layer w6: v1(-53.25,-498.25) -31.31,-498.25 -10.31,-519.25 R53x.2@-10.31,-545
  Conexiones w6: v1(-53.25,-498.25) -1.25,-550.25 43.25,-550.25 60.75,-532.75 60.75,-431.02 125.75,-366.02 125.75,-348.75 v1(56.75,-279.75)
  Bottom Layer w6: SIG3.25@-171.72,-275.59 -115.25,-275.59 -114.25,-274.59 -114.25,-260.25 -113.25,-259.25 -63,-259.25 -58.25,-264 R53y.2@-44.69,-264 -30.25,-264 -26.25,-268 -26.25,-281.84 -25.25,-282.84 53.66,-282.84 v1(56.75,-279.75)
NetR54x_2: R54x.2 R54y.2 SIG3.27 | length 506.1
  Top Layer w6: R54x.2@-10.31,-600 4,-600 16.25,-587.75 16.25,-525.75 v2(23.75,-518.25)
  Conexiones w6: v1(-92.25,-353.5) -92.25,-402.25 v2(23.75,-518.25)
  Bottom Layer w6: SIG3.27@-171.72,-354.33 -171.72,-340.25 -93,-340.25 -92.25,-341 v1@-79.75,-341 ; v1(-92.25,-353.5) v1@-79.75,-341 ; R54y.2@-14.69,-341 v1@-79.75,-341
NetR55x_2: R55x.2 R55y.2 SIG4.25 | length 2311.4
  Top Layer w6: v1(-416.75,-299.75) -387.5,-329 -349,-329 -337.25,-317.25 -24,-317.25 42.5,-250.75 406.25,-250.75 534.25,-378.75 534.25,-452.25 518.25,-468.25 466.07,-468.25 445.42,-488.9 445.42,-531.75 432.44,-544.73 399.26,-544.73 343.78,-489.25 62.75,-489.25 36.75,-463.25 -194.25,-463.25 -209.69,-478.69 R55x.2@-209.69,-545
  Bottom Layer w6: SIG4.25@-644.16,-285.59 -599.25,-285.59 -598.25,-284.59 -598.25,-280.28 -581.75,-263.78 -556.75,-263.78 -539.25,-281.28 -539.25,-288 -538.25,-289 R55y.2@-524.69,-289 -524.69,-307.25 -523.69,-308.25 -425.25,-308.25 v1(-416.75,-299.75)
NetR56x_2: R56x.2 R56y.2 SIG4.27 | length 902.1
  Top Layer w6: R56x.2@-209.69,-600 -209.69,-618.25 -208.69,-619.25 -138.25,-619.25 v1(-101.25,-582.25)
  Bottom Layer w6: SIG4.27@-644.16,-364.33 -574.25,-364.33 -570.91,-367.67 R56y.2@-499.69,-367.67 -499.69,-349.25 -498.69,-348.25 -442.34,-348.25 -403.34,-387.25 -244.8,-387.25 -225.25,-406.8 -225.25,-459.34 -236.72,-470.81 -236.72,-549.25 -224.72,-561.25 -122.25,-561.25 v1(-101.25,-582.25)
NetR57x_2: R57x.2 R57y.2 SIG1.29 | length 704
  Top Layer w6: R57x.2@349.69,-660 465,-660 v1(477.5,-672.5)
  Bottom Layer w6: v1(477.5,-672.5) 477.5,-647.5 551.31,-573.69 551.31,-562.99 557.8,-556.5 688,-556.5 701.37,-543.13 701.37,-480.11 709.16,-472.32 709.16,-465.81 741.9,-433.07 SIG1.29@773.16,-433.07 825.75,-433.07 831.49,-427.33 R57y.2@885.31,-427.33
NetR58x_2: R58x.2 R58y.2 SIG1.31 | length 1054.9
  Top Layer w6: R58x.2@349.69,-715 374.75,-715 v1(398.25,-738.5)
  Bottom Layer w6: v1(398.25,-738.5) 529,-869.25 798.25,-869.25 880.75,-786.75 880.75,-574.31 818.25,-511.81 ; SIG1.31@773.16,-511.81 818.25,-511.81 ; R58y.2@895.31,-505 837.56,-505 830.75,-511.81 818.25,-511.81
NetR59x_2: R59x.2 R59y.2 SIG2.29 | length 557.2
  Top Layer w6: v1(100.75,-660) R59x.2@140.31,-660
  Bottom Layer w6: v1(100.75,-660) 140.5,-620.25 225.75,-620.25 240.75,-605.25 240.75,-448.07 255.75,-433.07 SIG2.29@300.72,-433.07 353.75,-433.07 370.68,-450 R59y.2@425.31,-450
NetR60x_2: R60x.2 R60y.2 SIG2.31 | length 1369
  Top Layer w6: v1(-101.25,-701.25) -101.25,-768.25 -83.25,-786.25 34.25,-786.25 105.5,-715 R60x.2@140.31,-715
  Bottom Layer w6: v1(-101.25,-701.25) -101.25,-773.75 -96.25,-778.75 355.75,-778.75 357.25,-777.25 357.25,-540.25 ; SIG2.31@300.72,-511.81 SIG2.31@324.75,-511.81 ; R60y.2@455.31,-530 455.31,-540.25 357.25,-540.25 ; SIG2.31@324.75,-511.81 324.75,-539.25 325.75,-540.25 357.25,-540.25 ; SIG2.31@324.75,-511.81 355.81,-511.81 357.25,-513.25 357.25,-540.25
NetR61x_2: R61x.2 R61y.2 SIG3.29 | length 865.1
  Top Layer w6: v1(-53.75,-749.25) -29.75,-773.25 23.25,-773.25 39.75,-756.75 39.75,-685 9.75,-655 R61x.2@-10.31,-655
  Bottom Layer w6: SIG3.29@-171.72,-433.07 SIG3.29@-159.47,-433.07 ; v1(-53.75,-749.25) -53.75,-587.75 -94.25,-547.25 -224.72,-544.25 -224.72,-483.25 -167.17,-438.99 SIG3.29@-159.47,-433.07 ; R61y.2@-44.69,-418 SIG3.29@-159.47,-433.07
NetR62x_2: R62x.2 R62y.2 SIG3.31 | length 473.4
  Top Layer w6: R62x.2@-10.31,-710 -10.31,-723.19 v1(10.75,-744.25)
  Bottom Layer w6: SIG3.31@-171.72,-511.81 -82.69,-511.81 -66.99,-527.51 -31.75,-527.51 -14.69,-510.44 ; R62y.2@-14.69,-495 -14.69,-510.44 ; v1(10.75,-744.25) -14.69,-718.82 -14.69,-510.44
NetR63x_2: R63x.2 R63y.2 SIG4.29 | length 1120.1
  Top Layer w6: v1(-213.75,-771.25) -230.72,-754.28 -230.72,-656.25 -229.47,-655 R63x.2@-209.69,-655
  Bottom Layer w6: SIG4.29@-644.16,-443.07 -586.25,-443.07 -582.99,-446.33 ; R63y.2@-524.69,-446.33 -582.99,-446.33 ; v1(-213.75,-771.25) -269.75,-715.25 -547.22,-715.25 -568.22,-694.25 -568.22,-572.28 -589.01,-551.49 -696.25,-551.49 -697.25,-550.49 -697.25,-461.83 -681.75,-446.33 -582.99,-446.33
NetR64x_2: R64x.2 R64y.2 SIG4.31 | length 1377.8
  Top Layer w6: R64x.2@-209.69,-710 -203.25,-710 -203.25,-717.25 -110.19,-810.31 117.81,-810.31 v1(140.75,-833.25)
  Bottom Layer w6: SIG4.31@-644.16,-521.81 -545.22,-521.81 -542.03,-525 R64y.2@-499.69,-525 -499.69,-570.25 -440.69,-629.25 -240.25,-629.25 -225.25,-644.25 -225.25,-698.25 -90.25,-833.25 v1(140.75,-833.25)
pads on no net: SIG1.33 SIG2.34 SIG3.35

## Polygon pours and split planes (outlines as drawn)
GND on Tierra (split plane): 999.9,-999.9 -999.9,-999.9 -999.9,999.9 999.9,999.9

## Text inside footprints (layer, text, board x,y; h text height)
P1: Top Overlay "1" at -867.99,-950 h39.37; Top Overlay "9" at -549.09,-950 h39.37
SIGX: Top Overlay "1" at -227.99,825 h39.37; Top Overlay "15" at 235,825 h39.37
SIGY: Top Overlay "1" at 277.99,-855 h39.37 r180; Top Overlay "15" at -185,-855 h39.37 r180